# EAGLE board CT_schematic (EAGLE 7.6.0)

Size 100 x 80 mm. Coordinates in mm from the lower left corner, seen from the top.
Outline: 0,0 100,0 100,80 0,80 0,0
Copper layers (1*16): Top 0.035mm / dielectric 1.5mm / Bottom 0.035mm
Design rules "default": minimum track width 10mil, minimum drill 24mil, track to track 8mil, track to pad 8mil, pad to pad 8mil, via to via 8mil, smd to smd 8mil, copper to edge 40mil, drill to drill 8mil, minimum pad ring 10mil, minimum via ring 8mil, stop-mask expansion 4mil, vias tented up to drill 0mil, thermal gap 10mil

## Footprints (pad centres in the part's own frame; a part is rotated, then mirrored left to right if it is on the bottom)
C0603 = smd 0.8 x 0.8: 1 -0.762,0; 2 0.762,0
C0402 = smd 0.5 x 0.5: 1 -0.508,0; 2 0.508,0
C0805 = smd 1.2 x 1.3: 1 -1.016,0; 2 1.016,0
EXV-9H = smd 3.505 x 1.676: 1 -2.857,0; 2 2.857,0
L0603 = smd 0.8 x 0.8: 1 -0.762,0; 2 0.762,0
DR1040 = smd 1.6 x 3.2: 1 -4.458,0; 2 4.458,0
PJ-037B_PACKAGE = drill 3.7 square: 1 12,0 | drill 3.2 square: 2 6,0
R0603 = smd 0.8 x 0.8: 1 -0.762,0; 2 0.762,0
LQFP64 = smd 0.3 x 1.2: 1 -3.75,-5.75; 2 -3.25,-5.75; 3 -2.75,-5.75; 4 -2.25,-5.75; 5 -1.75,-5.75; 6 -1.25,-5.75; 7 -0.75,-5.75; 8 -0.25,-5.75; 9 0.25,-5.75; 10 0.75,-5.75; 11 1.25,-5.75; 12 1.75,-5.75; 13 2.25,-5.75; 14 2.75,-5.75; 15 3.25,-5.75; 16 3.75,-5.75; 33 3.75,5.75; 34 3.25,5.75; 35 2.75,5.75; 36 2.25,5.75; 37 1.75,5.75; 38 1.25,5.75; 39 0.75,5.75; 40 0.25,5.75; 41 -0.25,5.75; 42 -0.75,5.75; 43 -1.25,5.75; 44 -1.75,5.75; 45 -2.25,5.75; 46 -2.75,5.75; 47 -3.25,5.75; 48 -3.75,5.75 | smd 1.2 x 0.3: 17 5.75,-3.75; 18 5.75,-3.25; 19 5.75,-2.75; 20 5.75,-2.25; 21 5.75,-1.75; 22 5.75,-1.25; 23 5.75,-0.75; 24 5.75,-0.25; 25 5.75,0.25; 26 5.75,0.75; 27 5.75,1.25; 28 5.75,1.75; 29 5.75,2.25; 30 5.75,2.75; 31 5.75,3.25; 32 5.75,3.75; 49 -5.75,3.75; 50 -5.75,3.25; 51 -5.75,2.75; 52 -5.75,2.25; 53 -5.75,1.75; 54 -5.75,1.25; 55 -5.75,0.75; 56 -5.75,0.25; 57 -5.75,-0.25; 58 -5.75,-0.75; 59 -5.75,-1.25; 60 -5.75,-1.75; 61 -5.75,-2.25; 62 -5.75,-2.75; 63 -5.75,-3.25; 64 -5.75,-3.75
SOIC-8 = smd 1.6 x 0.6: 1 -2.7,1.905 | smd 1.55 x 0.6: 2 -2.7,0.635; 3 -2.7,-0.635; 4 -2.7,-1.905; 5 2.7,-1.905; 6 2.7,-0.635; 7 2.7,0.635; 8 2.7,1.905
SAMTEC_FTSH-105-01-L-DV-K = smd 0.762 x 2.794: 1 -2.54,-2.032; 2 -2.54,2.032; 3 -1.27,-2.032; 4 -1.27,2.032; 5 0,-2.032; 6 0,2.032; 7 1.27,-2.032; 8 1.27,2.032; 9 2.54,-2.032; 10 2.54,2.032
LGA-12 = smd 0.35 x 0.3: 1 -0.8,0.75; 2 -0.8,0.25; 3 -0.8,-0.25; 4 -0.8,-0.75; 7 0.8,-0.75; 8 0.8,-0.25; 9 0.8,0.25; 10 0.8,0.75 | smd 0.3 x 0.35: 5 -0.25,-0.8; 6 0.25,-0.8; 11 0.25,0.8; 12 -0.25,0.8
TDFN-8/6MM = smd 0.3 x 0.75: 1 0,0; 2 0.5,0; 3 1,0; 4 1.5,0; 5 1.5,3; 6 1,3; 7 0.5,3; 8 0,3
ASEK = smd 1.4 x 1: 1 -1.1,-0.8; 2 1.1,-0.8; 3 1.1,0.8; 4 -1.1,0.8
ASFL1 = smd 1.7 x 1.5: 1 -1.27,-1.1; 2 1.27,-1.1; 3 1.27,1.1; 4 -1.27,1.1
TSOT-23-5 = smd 1.3 x 0.62: 1 -1.31,0.95; 2 -1.31,0; 3 -1.31,-0.95; 4 1.31,-0.95; 5 1.31,0.95
SON-6 = smd 0.55 x 0.3: 1 -0.355,0.5 | smd 0.52 x 0.3: 2 -0.37,0; 3 -0.37,-0.5; 4 0.37,-0.5; 5 0.37,0; 6 0.37,0.5
SW_4-1437565-2 = smd 1.4 x 2.1: 1 -2.23,4.55; 2 -2.23,-4.55; 3 2.23,4.55; 4 2.23,-4.55
LGM67K-G1J2-24-Z = smd 0.8 x 1.4: A -2,0; C 0,0
NC7SZ125M5X = smd 1.3 x 0.7: 1 -1.3,0.95; 2 -1.3,0; 3 -1.3,-0.95; 4 1.3,-0.95; 5 1.3,0.95
DUMMY_PACKAGE_160 = drill 0.3: 1 0,-1; 2 1.5,-1; 3 3,-1

## Placement (x,y rotation side)
C1  1e-06  [C0603]  -15.24,67.31 0 top  (outside the outline)
C2  1e-07  [C0603]  -19.05,67.31 0 top  (outside the outline)
C3  1e-07  [C0603]  -22.86,67.31 0 top  (outside the outline)
C4  1e-07  [C0603]  -26.67,67.31 0 top  (outside the outline)
C5  1e-07  [C0603]  -30.48,67.31 0 top  (outside the outline)
C6  1e-07  [C0603]  -34.29,67.31 0 top  (outside the outline)
C7  4.7e-06  [C0603]  -69.85,62.23 0 top  (outside the outline)
C8  1e-08  [C0603]  -38.1,67.31 0 top  (outside the outline)
C9  1e-06  [C0603]  -41.91,67.31 0 top  (outside the outline)
C10  1e-08  [C0402]  -22.86,72.39 0 top  (outside the outline)
C11  1e-08  [C0402]  -26.67,72.39 0 top  (outside the outline)
C12  1e-07  [C0402]  -30.48,72.39 0 top  (outside the outline)
C13  1e-05  [C0805]  -52.07,49.53 0 top  (outside the outline)
C14  1e-07  [C0402]  -34.29,72.39 0 top  (outside the outline)
C15  1e-07  [C0402]  -38.1,72.39 0 top  (outside the outline)
C16  1e-08  [C0402]  -41.91,72.39 0 top  (outside the outline)
C17  1e-08  [C0402]  -45.72,72.39 0 top  (outside the outline)
C18  1e-08  [C0402]  -49.53,72.39 0 top  (outside the outline)
C19  1e-05  [C0805]  -57.15,49.53 0 top  (outside the outline)
C20  1e-05  [C0805]  -62.23,49.53 0 top  (outside the outline)
C21  1e-07  [C0402]  -53.34,72.39 0 top  (outside the outline)
C22  0.0001  [EXV-9H]  -55.88,41.91 0 top  (outside the outline)
C23  0.0001  [EXV-9H]  -17.78,50.8 0 top  (outside the outline)
C24  1e-08  [C0402]  -57.15,72.39 0 top  (outside the outline)
C25  1e-08  [C0402]  -60.96,72.39 0 top  (outside the outline)
F1  240.0  [L0603]  -45.72,67.31 0 top  (outside the outline)
I1  7e-06  [DR1040]  -55.88,20.32 0 top  (outside the outline)
J1  PJ-037B  [PJ-037B_PACKAGE]  -57.15,7.62 0 top  (outside the outline)
R2  1000.0  [R0603]  -49.53,67.31 0 top  (outside the outline)
R4  4700.0  [R0603]  -53.34,67.31 0 top  (outside the outline)
R5  2200.0  [R0603]  -57.15,67.31 0 top  (outside the outline)
R6  2200.0  [R0603]  -60.96,67.31 0 top  (outside the outline)
R7  2200.0  [R0603]  -64.77,67.31 0 top  (outside the outline)
R8  2200.0  [R0603]  -68.58,67.31 0 top  (outside the outline)
R9  10000.0  [R0603]  -43.18,57.15 0 top  (outside the outline)
R10  10000.0  [R0603]  -48.26,57.15 0 top  (outside the outline)
R11  10000.0  [R0603]  -53.34,57.15 0 top  (outside the outline)
R12  10000.0  [R0603]  -58.42,57.15 0 top  (outside the outline)
R13  10000.0  [R0603]  -63.5,57.15 0 top  (outside the outline)
R14  10000.0  [R0603]  -68.58,57.15 0 top  (outside the outline)
R15  10000.0  [R0603]  -15.24,62.23 0 top  (outside the outline)
R16  10000.0  [R0603]  -20.32,62.23 0 top  (outside the outline)
R17  10000.0  [R0603]  -25.4,62.23 0 top  (outside the outline)
R18  10000.0  [R0603]  -30.48,62.23 0 top  (outside the outline)
R19  10000.0  [R0603]  -35.56,62.23 0 top  (outside the outline)
R20  5.0  [R0603]  -15.24,72.39 0 top  (outside the outline)
R21  10000.0  [R0603]  -40.64,62.23 0 top  (outside the outline)
R22  10000.0  [R0603]  -45.72,62.23 0 top  (outside the outline)
R23  10000.0  [R0603]  -50.8,62.23 0 top  (outside the outline)
R24  10000.0  [R0603]  -55.88,62.23 0 top  (outside the outline)
R25  220000.0  [R0603]  -27.94,57.15 0 top  (outside the outline)
R26  1000000.0  [R0603]  -22.86,57.15 0 top  (outside the outline)
R27  10000.0  [R0603]  -60.96,62.23 0 top  (outside the outline)
R28  10000.0  [R0603]  -66.04,62.23 0 top  (outside the outline)
R29  9100.0  [R0603]  -19.05,72.39 0 top  (outside the outline)
R30  680000.0  [R0603]  -33.02,57.15 0 top  (outside the outline)
R31  120000.0  [R0603]  -38.1,57.15 0 top  (outside the outline)
U1  STM32F302R8T7  [LQFP64]  -24.13,21.59 0 top  (outside the outline)
U2  AT25010B-SSHL-T  [SOIC-8]  -39.37,33.02 0 top  (outside the outline)
U3  AT25640B-SSHL-T  [SOIC-8]  -55.88,33.02 0 top  (outside the outline)
U4  FTSH-105-01-L-DV-K  [SAMTEC_FTSH-105-01-L-DV-K]  -35.56,7.62 0 top  (outside the outline)
U5  LIS2HH12TR  [LGA-12]  -68.58,49.53 0 top  (outside the outline)
U6  24AA64T-I/MNY  [TDFN-8/6MM]  -24.13,31.75 0 top  (outside the outline)
U7  ASEK-32.768KHz-ECST  [ASEK]  -46.99,41.91 0 top  (outside the outline)
U8  ASFL1-25MHZ-NCS  [ASFL1]  -26.67,41.91 0 top  (outside the outline)
U9  ltc3406es5  [TSOT-23-5]  -15.24,57.15 0 top  (outside the outline)
U10  TPS3895ADRYR  [SON-6]  -13.97,76.2 0 top  (outside the outline)
U11  4-1437565-2  [SW_4-1437565-2]  -45.72,20.32 0 top  (outside the outline)
U12  Q65110A2395  [LGM67K-G1J2-24-Z]  -27.94,49.53 0 top  (outside the outline)
U13  nc7sz125m5x  [NC7SZ125M5X]  -39.37,48.26 0 top  (outside the outline)
U14  nc7sz125m5x  [NC7SZ125M5X]  -45.72,48.26 0 top  (outside the outline)
U15  Dummy  [DUMMY_PACKAGE_160]  -67.31,72.39 0 top  (outside the outline)

## Library data of the parts
C1-C25 F1 I1 J1 R2 R4-R31 U1-U15 = circuit_tree

## Nets
CLK_U1_3: U1.3 U7.3
CLK_U1_5: U1.5 U8.3
GND: C1.2 C2.2 C3.2 C4.2 C5.2 C6.2 C7.2 C8.2 C9.2 C10.2 C11.2 C12.2 C13.2 C14.2 C15.2 C16.2 C17.2 C18.2 C19.2 C20.1 C20.2 C21.2 C22.2 C23.2 C24.2 C25.2 J1.2 R2.2 R9.2 R19.2 R20.2 R23.2 R25.2 R29.2 R31.2 U1.12 U1.18 U1.31 U1.47 U1.63 U2.4 U3.4 U4.3 U4.5 U5.5 U5.6 U5.7 U5.8 U6.4 U6.7 U7.2 U8.2 U9.2 U10.2 U12.C U13.2 U13.3 U14.1 U14.3 U15.1
NET_U1_7: R4.1 U1.7 U14.4
NET_U1_13: C8.1 C9.1 F1.1 U1.13
NET_U1_42: R7.1 U1.42 U6.6
NET_U1_43: R8.1 U1.43 U6.5
NET_U1_58: R5.1 U1.58 U5.1
NET_U1_59: R6.1 U1.59 U5.4
NET_U1_60: R9.1 U1.60
NET_U1_61: U12.A
NET_U1_62: U11.3 U11.4
NET_U2_3: R10.1 U2.3
NET_U2_7: R12.1 U2.7
NET_U3_3: R13.1 U3.3
NET_U3_7: R15.1 U3.7
NET_U4_9: R20.1 U4.9
NET_U5_2: R21.1 U5.2
NET_U6_1: R22.1 U6.1
NET_U6_2: R23.1 U6.2
NET_U6_3: R24.1 U6.3
NET_U9_1: U9.1
NET_U9_3: I1.1 U9.3
NET_U9_5: R25.1 R26.1 U9.5
NET_U9_ATNET_3: I1.2 R26.2
NET_U10_1: R28.1 R29.1 U10.1
NET_U10_3: R30.2 R31.1 U10.3
NET_U10_4: R27.1 U10.4 U13.4 U14.2
NET_U11_1: R2.1 U11.1 U11.2
PROC_PC13: U1.2 U15.2
PROC_PC15_OSC32_OUT: U1.4 U15.3
PROC_SPI2_MISO: U1.35 U3.2
PROC_SPI2_MOSI: U1.36 U3.5
PROC_SPI2_NSS: R14.1 U1.33 U3.1
PROC_SPI2_SCK: U1.6 U3.6
PROC_SPI3_MISO: U1.52 U2.2
PROC_SPI3_MOSI: U1.53 U2.5
PROC_SPI3_NSS: R11.1 U1.20 U2.1
PROC_SPI3_SCK: U1.51 U2.6
PROC_SYS_JTCK_SWCLK: R19.1 U1.49 U4.4
PROC_SYS_JTDI: R17.1 U1.50 U4.8
PROC_SYS_JTDO_TRACESWO: U1.55 U4.6
PROC_SYS_JTMS_SWDIO: R18.1 U1.46 U4.2
RST_OUT_U4_JTAG_RST_B: R16.1 U4.10 U13.1
VCC_S1_5V4: C19.1 C22.1 C23.1 J1.1 U9.4
VCC_TIER1_3V3: C1.1 C2.1 C3.1 C4.1 C5.1 C6.1 C7.1 C10.1 C11.1 C12.1 C13.1 C14.1 C15.1 C16.1 C17.1 C18.1 C20.2 C21.1 C24.1 C25.1 F1.2 I1.2 R4.2 R5.2 R6.2 R7.2 R8.2 R10.2 R11.2 R12.2 R13.2 R14.2 R15.2 R16.2 R17.2 R18.2 R21.2 R22.2 R24.2 R26.2 R27.2 R28.2 R30.1 U1.1 U1.19 U1.32 U1.48 U1.64 U2.8 U3.8 U4.1 U5.9 U5.10 U6.8 U7.4 U8.4 U10.6 U13.5 U14.5

## Tracks (layer width: path | path; a pad name or v marks a point on that pad's centre or on a via)
CLK_U1_3  (1 unrouted)
CLK_U1_5  (1 unrouted)
GND  (59 unrouted)
NET_U1_7  (2 unrouted)
NET_U1_13  (3 unrouted)
NET_U1_42  (2 unrouted)
NET_U1_43  (2 unrouted)
NET_U1_58  (2 unrouted)
NET_U1_59  (2 unrouted)
NET_U1_60  (1 unrouted)
NET_U1_62  (1 unrouted)
NET_U2_3  (1 unrouted)
NET_U2_7  (1 unrouted)
NET_U3_3  (1 unrouted)
NET_U3_7  (1 unrouted)
NET_U4_9  (1 unrouted)
NET_U5_2  (1 unrouted)
NET_U6_1  (1 unrouted)
NET_U6_2  (1 unrouted)
NET_U6_3  (1 unrouted)
NET_U9_3  (1 unrouted)
NET_U9_5  (2 unrouted)
NET_U9_ATNET_3  (1 unrouted)
NET_U10_1  (2 unrouted)
NET_U10_3  (2 unrouted)
NET_U10_4  (3 unrouted)
NET_U11_1  (2 unrouted)
PROC_PC13  (1 unrouted)
PROC_PC15_OSC32_OUT  (1 unrouted)
PROC_SPI2_MISO  (1 unrouted)
PROC_SPI2_MOSI  (1 unrouted)
PROC_SPI2_NSS  (2 unrouted)
PROC_SPI2_SCK  (1 unrouted)
PROC_SPI3_MISO  (1 unrouted)
PROC_SPI3_MOSI  (1 unrouted)
PROC_SPI3_NSS  (2 unrouted)
PROC_SPI3_SCK  (1 unrouted)
PROC_SYS_JTCK_SWCLK  (2 unrouted)
PROC_SYS_JTDI  (2 unrouted)
PROC_SYS_JTDO_TRACESWO  (1 unrouted)
PROC_SYS_JTMS_SWDIO  (2 unrouted)
RST_OUT_U4_JTAG_RST_B  (2 unrouted)
VCC_S1_5V4  (4 unrouted)
VCC_TIER1_3V3  (58 unrouted)